# Altium PCB Simple Transistor PQFN No Vias.PcbDoc
Units mm, origin at the board's own origin, x right, y up, seen from the top; angles counter-clockwise.
Board outline 40 x 40 mm, 2 copper layers (Top Layer, Bottom Layer), stack 1.571 mm thick; 1 components, 3 nets, 9 pads, 4 vias.
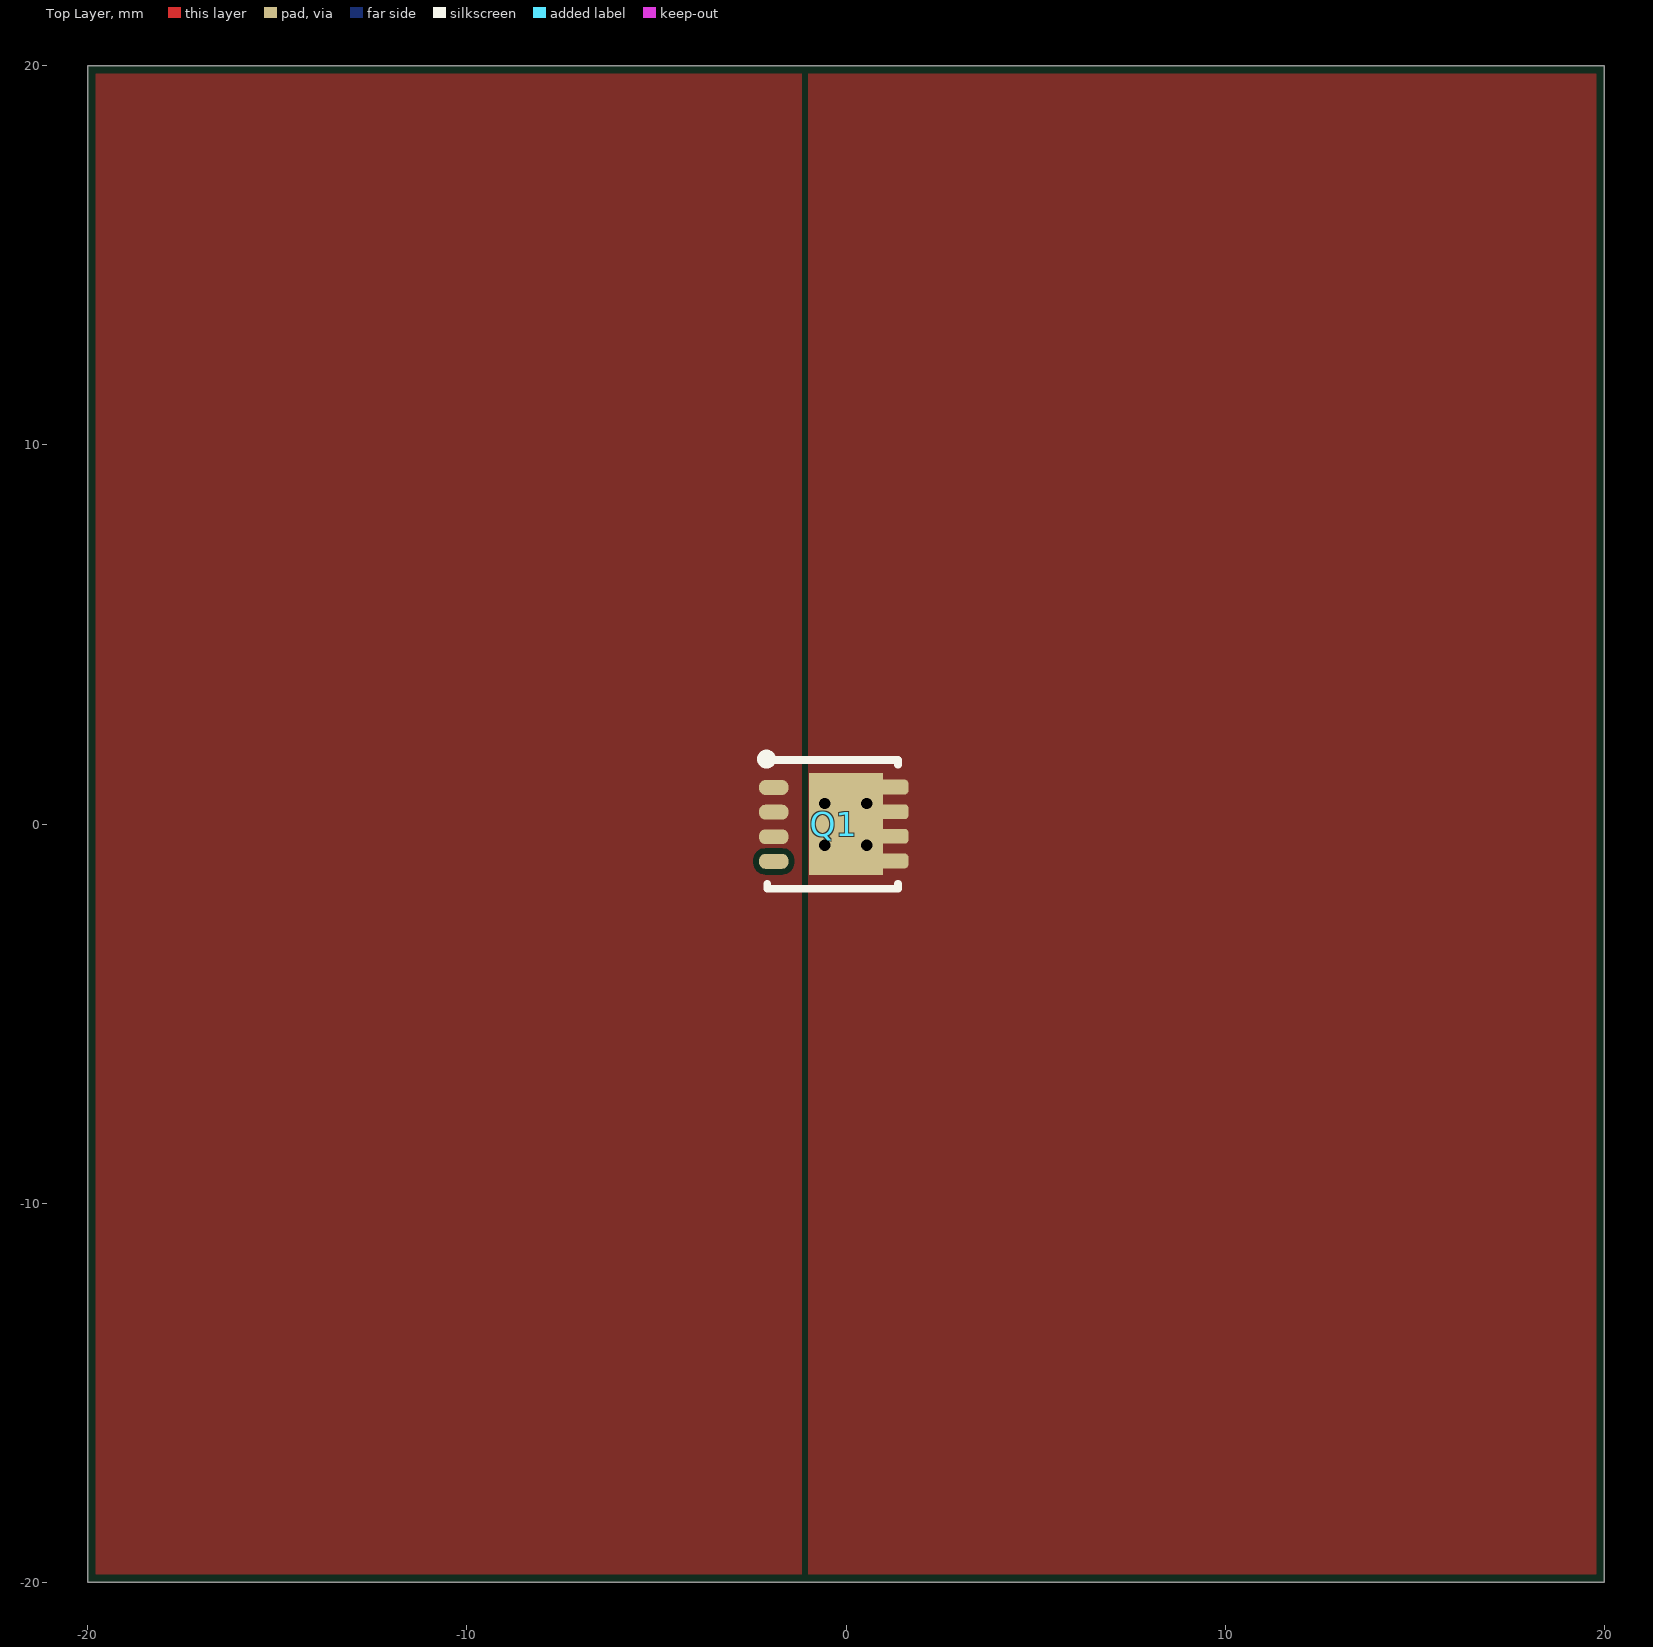
[diagram p0: Top Layer view]
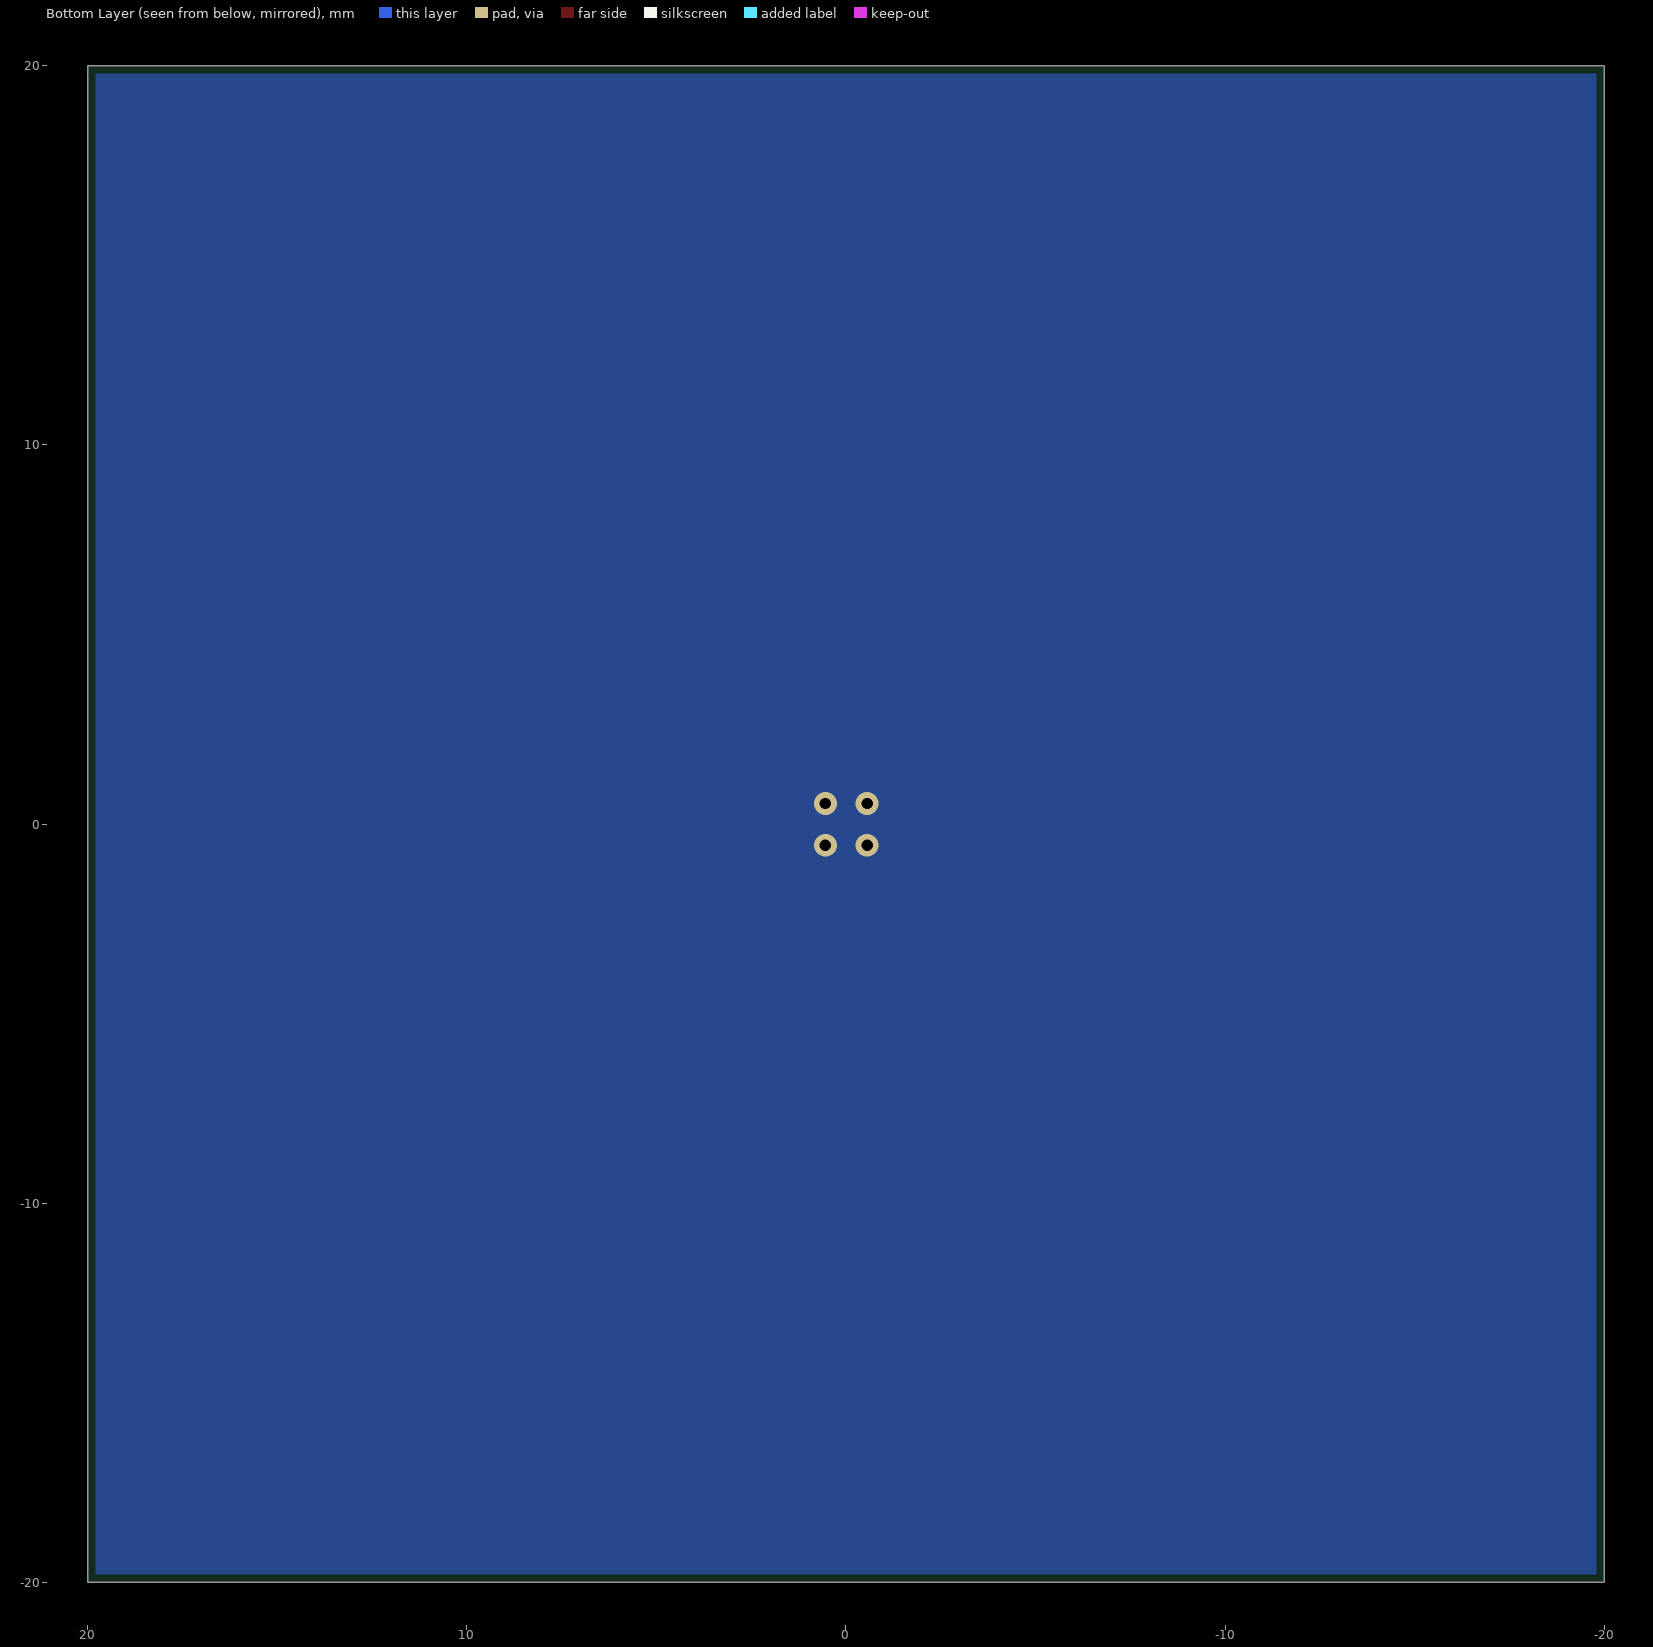
[diagram p1: Bottom Layer view, seen from below]

## Layer stack, top to bottom
Top Layer: signal copper 0.0356
Dielectric 1: dielectric 1.5, FR-4, Dk 4.8
Bottom Layer: signal copper 0.0356

## Board outline
-20,-20 20,-20 20,20 -20,20

## Design rules (kind name [scope] priority, off if disabled: settings)
AssemblyTestPointUsage [All] p1: valid=2
AssemblyTestpoint [All] p1: testpointundercomponent=TRUE minsize=1.016 maxsize=2.54 preferedsize=1.524 minholesize=0 maxholesize=1.016 preferedholesize=0.813 testpointgrid=0.025 usegrid=FALSE gridtolerance=0 allowsidebottom=TRUE minspacing=3.13
BoardOutlineClearance [All] p1: gap=0.2 ignorepadtopadclearanceinfootprint=FALSE
Clearance [All] p1: gap=0.15 ignorepadtopadclearanceinfootprint=FALSE
ComponentClearance [All] p1: gap=0.25 collisioncheckmode=3 verticalgap=0.2 showdistances=TRUE
DiffPairsRouting [All] p1: maxlimit=0.254 minlimit=0.152 mostfreqgap=0.152 toplayer_minwidth=0.178 toplayer_maxwidth=0.381 toplayer_prefwidth=0.178 bottomlayer_minwidth=0.178 bottomlayer_maxwidth=0.381 bottomlayer_prefwidth=0.178 maxuncoupledlength=12.7
FabricationTestPointUsage TestPointUsage [All] p1: valid=0 allowmultiple=FALSE
FabricationTestpoint Testpoint [All] p1: side=2 testpointundercomponent=TRUE minsize=1.016 maxsize=2.54 preferedsize=1.524 minholesize=0.508 maxholesize=1.016 preferedholesize=0.813 testpointgrid=0.025 allowsidebottom=TRUE usegrid=FALSE gridtolerance=0 minspacing=2.35
Height [All] p1: minheight=0 maxheight=100 prefheight=12.7
HoleSize [All] p1: absolutevalues=TRUE maxlimit=10 minlimit=0.3 maxpercent=80.000 minpercent=20.000
HoleToHoleClearance [All] p1: gap=0.25 allowstackedmicrovias=TRUE
MinimumAnnularRing [All] p1: minimumring=0.15
MinimumSolderMaskSliver [All] p1: minsoldermaskwidth=0
PlaneConnect [All] p1: planeconnectstyle=Direct reliefexpansion=0.508 reliefentries=4 reliefconductorwidth=0.254 reliefairgap=0.254
PolygonConnect [All] p1: connectstyle=Direct reliefconductorwidth=0.381 reliefentries=4 polygonreliefangle="45 Angle" airgapwidth=0.254
RoutingVias [All] p1: holewidth=0.3 width=0.5 viastyle="Through Hole" minholewidth=0.3 minwidth=0.5 maxholewidth=20 maxwidth=30
SilkToSolderMaskClearance [IsPad] p1: minsilkscreentomaskgap=0.076 clearancetoexposedcopper=TRUE
SolderMaskExpansion [All] p1: expansion=0.102 istentingtop=FALSE
UnRoutedNet [All] p1: checkbadconnections=TRUE
Width [All] p1: maxlimit=5.08 minlimit=0.15 preferedwidth=0.15
17 further rules are at their usual default settings.

## Components (designator, comment, footprint, x,y, rotation, side; value= is the part's Value field where it differs from the comment)
Q1 "CSD18543Q3A" PQFN65P330X332X105_HS-9N -0.322,-0.005 r180 top

## Footprints (in the part's own frame and the unit in brackets; to place one, negate y for a bottom-side part, rotate by r counter-clockwise, add the part's x,y. Pads: shape width x height; smd on the part's side, far side on the other; paste and mask are expansions set on the pad)
PQFN65P330X332X105_HS-9N [mm] "PQFN, 8-Leads, Body 3.30x3.33mm, Pitch 0.65mm, Thermal Pad 2.34x1.80mm, IPC Medium Density"
  rrect80% 0.77x0.39 smd mask+0.05: 1(1.585,-0.969) 2(1.585,-0.319) 3(1.585,0.331) 4(1.585,0.981)
  rrect50% 0.77x0.39 smd mask+0.05: 5(-1.585,0.97) 6(-1.585,0.32) 7(-1.585,-0.33) 8(-1.585,-0.98)
  rect 1.96x2.7 smd paste-3 mask+0.05: 9(-0.322,-0.005)
  silkscreen extent -1.7,-1.84 1.9,1.71, body extent -1.65,-1.67 1.71,1.69, height 1

## Part data
Q1: "NMOS Transistor 60V 8.1mR", Case/Package="SON 3.3-mm × 3.3-mm", Continuous Drain Current (ID)=35A, Drain to Source Resistance=8.1, Drain to Source Voltage=60, Manufacturer="Texas Instruments", Max Operating Temperature=150°C, Max Power Dissipation=2.8W, Threshold Voltage=2.7, Height=o.9, HelpURL=http://www.ti.com/lit/ds/symlink/csd18543q3a.pdf, Manufacturer Part Number=CSD18543Q3A, Mount="surface mount", Part Number=CSD18543Q3A, Polarization=NMOS, RoHS=Compliant

## Via types
v1: diameter 0.6, hole 0.3, Top Layer to Bottom Layer, tented both sides, 4 vias

## Nets (pads, with @x,y where several pads share a name; then routed paths per layer and width w, separated by ;. In a path a pad name is that pad's centre, name@x,y a point inside that pad or via, vN(x,y) a via of type N, cw(c..) or ccw(c..) an arc to the next point about the centre after c; other vN are vias at no path point)
Drain: Q1.5 Q1.6 Q1.7 Q1.8 Q1.9
  other v1: -0.556,-0.559 0.544,-0.559 -0.556,0.541 0.544,0.541
Gate: Q1.4
Source: Q1.1 Q1.2 Q1.3

## Polygon pours and split planes (outlines as drawn)
Drain on Bottom Layer "NONET_L-01_P-001" (solid, remove dead copper, pour order 0): -20,20 20,20 20,-20 -20,-20
Source on Top Layer "NONET_L-01_P-001" (solid, remove dead copper, pour order 2): -1,20 -20,20 -20,-20 -1,-20
Drain on Top Layer "NONET_L-01_P-001" (solid, remove dead copper, pour order 1): -1,20 20,20 20,-20 -1,-20

## Silkscreen, mask and mechanical layers (free items; w line width, h text height)
Board:
  the board outline again, w0.254